# EAGLE board keyboard_translator_V1 v6 (EAGLE 9.7.0)
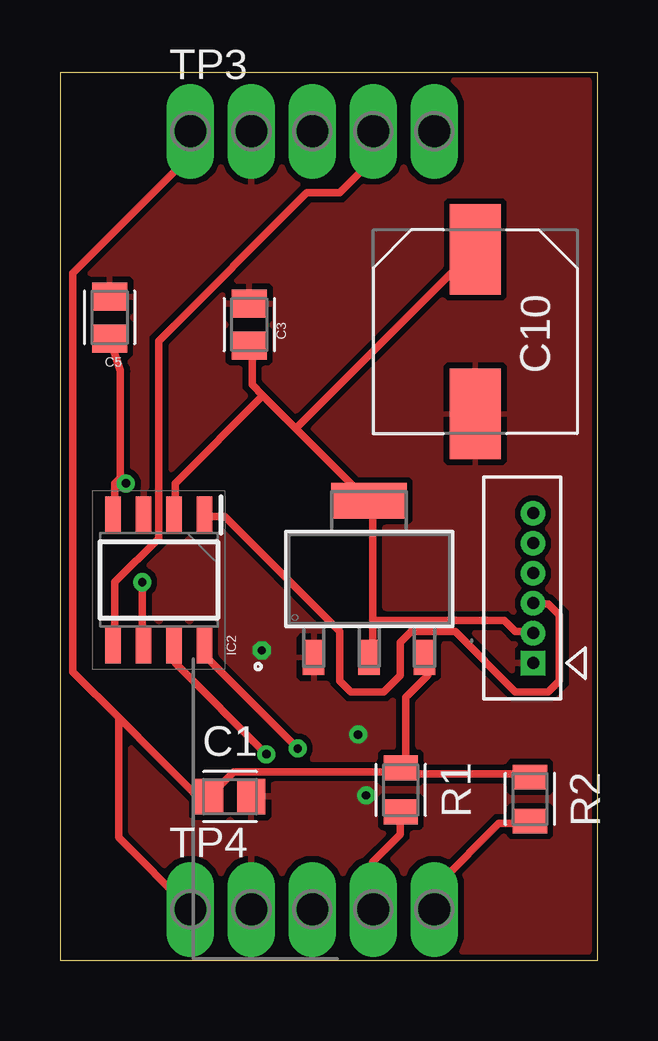
[diagram p0: board, top side]
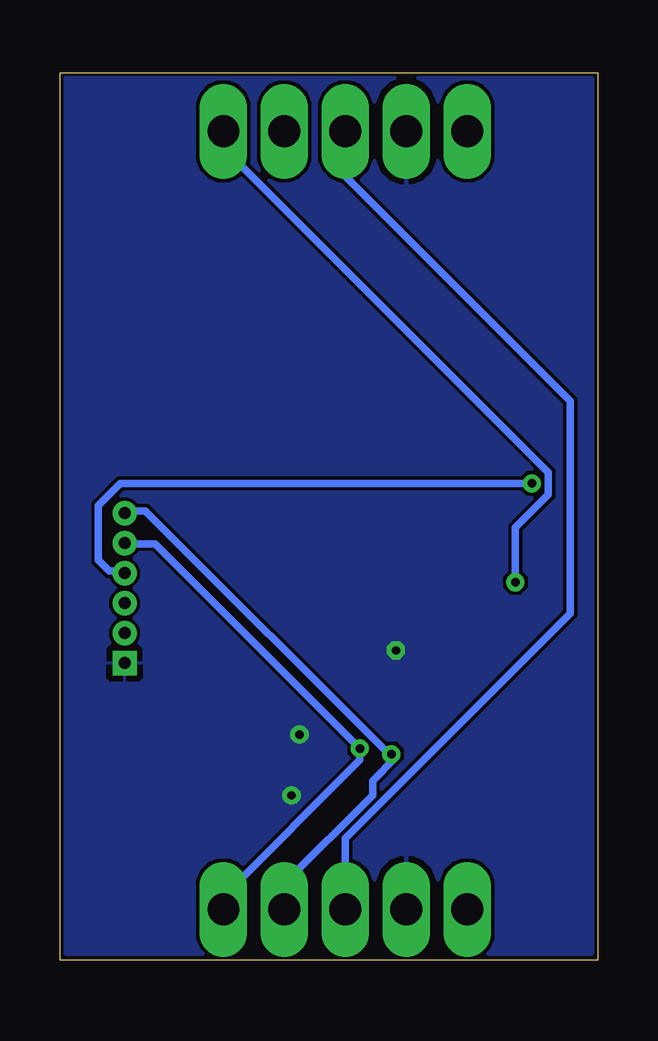
[diagram p1: board, bottom side, seen from below]

Size 22.4 x 37.01 mm. Coordinates in mm from the lower left corner, seen from the top.
Outline: 0,0 22.4,0 22.4,37.01 0,37.01 0,0
Copper layers (1*16): Top / Bottom
Stack-up Default Layer Stack: Top User Defined 0.035mm / Dielectric-1 User Defined 1.5mm / Bottom User Defined 0.035mm
Design rules: minimum copper width 12mil, minimum drill size 0.35mm, copper clearance wire_polygon to wire_polygon 6mil, copper clearance wire_polygon to pad_smd 6mil, copper clearance wire_polygon to via 6mil, copper clearance pad_smd to pad_smd 6mil, copper clearance pad_smd to via 6mil, copper clearance via to via 6mil, copper clearance smd to pad (same net) 6mil, copper clearance smd to via (same net) 6mil, copper clearance smd to smd (same net) 6mil, dimension clearance 6mil, restrict clearance 0mil, via restrict clearance 0mil, drill distance 6mil, keepout clearance 0mil

## Footprints (pad centres in the part's own frame; a part is rotated, then mirrored left to right if it is on the bottom)
CAPC2012X110 = smd 1.165 x 1.465: 1 -0.875,0; 2 0.875,0
CAPAE830X1050N = smd 3.764 x 2.115: 1 -3.426,0; 2 3.426,0
SOIC127P600X175-8N = smd 1.525 x 0.65: 1 -2.712,1.905; 2 -2.712,0.635; 3 -2.712,-0.635; 4 -2.712,-1.905; 5 2.712,-1.905; 6 2.712,-0.635; 7 2.712,0.635; 8 2.712,1.905
CON_530470610_MOL = drill 0.5 pad 0.85 square: 1 0,0 | drill 0.5 pad 0.85: 2 -1.25,0; 3 -2.5,0; 4 -3.75,0; 5 -5,0; 6 -6.25,0
RESC2012X65 = smd 1.031 x 1.42: 1 -0.919,0; 2 0.919,0
P5-25-13 = drill 1.321 pad 1.905 long: TP-1 -5.08,0; TP-2 -2.54,0; TP-3 0,0; TP-4 2.54,0; TP-5 5.08,0
SOT223-3_MXL = smd 0.889 x 1.473: 1 -2.311,-3.264; 2 0,-3.264; 3 2.311,-3.264 | smd 3.15 x 1.473: 4 0,3.264

## Placement (x,y rotation side)
C1  100nF  [CAPC2012X110]  7.09,6.83 0 top
C3  100nF  [CAPC2012X110]  7.88,26.51 90 top
C5  1uF  [CAPC2012X110]  2.07,26.81 90 top
C10  [CAPAE830X1050N]  17.3,26.21 270 top
IC2  STM32C011J6M6  [SOIC127P600X175-8N]  4.12,15.87 270 top
J1  530470610CON_530470610_MOL  [CON_530470610_MOL]  19.71,12.4 270 top
R1  NM 20k  [RESC2012X65]  14.2,7.11 270 top
R2  NM 20k  [RESC2012X65]  19.58,6.73 270 top
TP3  TP5P5-25-13  [P5-25-13]  10.52,34.57 0 top
TP4  TP5P5-25-13  [P5-25-13]  10.52,2.13 0 top
U1  SPX1117M3-L-3-3/TRSOT223-3_MXL  [SOT223-3_MXL]  12.88,15.9 0 top

## Library data of the parts
C1 C3 C5 C10 = Capacitor; CATEGORY: Capacitor
IC2 = STM32C011J6M6; DESCRIPTION: Mainstream Arm Cortex-M0+ MCU with 32 Kbytes of Flash memory, 6 Kbytes RAM, 48 MHz CPU, 2x USART, timers, ADC, comm. I/F, 2-3.6V; HEIGHT: 1.75mm; MANUFACTURER_NAME: STMicroelectronics; MANUFACTURER_PART_NUMBER: STM32C011J6M6; MOUSER_PART_NUMBER: 511-STM32C011J6M6; MOUSER_PRICE-STOCK: https://www.mouser.co.uk/ProductDetail/STMicroelectronics/STM32C011J6M6?qs=IPgv5n7u5Qas2LaNYHG%2FbQ%3D%3D
J1 = Library; COPYRIGHT: Copyright (C) 2024 Ultra Librarian. All rights reserved.; MANUFACTURER_PART_NUMBER: 530470610; MFR_NAME: Molex Connector Corporation
R1 R2 = Resistor; CATEGORY: Resistor; SUB-CATEGORY: Fixed
TP3 TP4 = testpad
U1 = 2023-10-17_10-46-12_Library; COPYRIGHT: Copyright (C) 2023 Ultra Librarian. All rights reserved.; MANUFACTURER_PART_NUMBER: SPX1117M3-L-3-3/TR; MFR_NAME: MaxLinear / Exar

## Nets
5V: C1.1 R1.1 R2.1 TP3.TP-1 TP4.TP-1 U1.3
AT_CLOCK_IN: IC2.6 TP3.TP-5
AT_DATA_IN: IC2.5 TP3.TP-4
GND: C1.2 C3.2 C5.2 C10.2 IC2.3 J1.1 TP3.TP-2 TP4.TP-2 U1.1
RST-TXD: C5.1 IC2.4 J1.4
SHIELD: TP3.TP-3 TP4.TP-3
TXD: IC2.1 J1.3
VDD: C3.1 C10.1 IC2.2 J1.2 U1.2 U1.4
XT_CLOCK_OUT: IC2.8 J1.5 R2.2 TP4.TP-5
XT_DATA_OUT: IC2.7 J1.6 R1.2 TP4.TP-4

## Tracks (layer width: path | path; a pad name or v marks a point on that pad's centre or on a via)
5V
  Top 0.305: R1.1 14.4,8.23 14.4,10.97 15.32,11.89 15.32,12.57 U1.3 | R2.1 19.43,7.77 14.63,7.77 14.4,8 R1.1 | 6.17,6.4 6.17,6.63 C1.1 | 2.5,10.07 2.44,10.01 2.44,5.13 TP4.TP-1 | 6.17,6.4 5.77,6.81 4.08,8.5 2.5,10.07 | 2.5,10.07 0.53,12.04 0.53,28.65 5.26,33.38 5.26,34.52 TP3.TP-1 | 6.17,6.4 C1.1 | R1.1 14.04,7.87 7.25,7.87 C1.1
AT_CLOCK_IN  (via drill 0.35)
  Top 0.305: v3.43,15.77 3.43,13.26 IC2.6
  Bottom 0.305: v3.43,15.77 3.43,18.06 2.06,19.43 2.06,20.34 15.54,33.83 15.54,34.52 TP3.TP-5
AT_DATA_IN
  Top 0.305: IC2.5 2.29,13.26 2.29,15.77 4.12,17.6 4.12,25.83 10.29,32 11.66,32 13.03,33.38 13.03,34.52 TP3.TP-4
GND  (via drill 0.35)
  other vias: 8.41,12.93 12.42,9.42 12.76,6.89
  pour Bottom: 0.15,36.93 22.25,36.93 22.25,0.2 0.15,0.2 0.15,0.1
  pour Top (isolate 0.254): 0.15,36.8 22.28,36.8 22.28,0.15 0.13,0.15 0.13,0.2
RST-TXD  (via drill 0.35)
  Top 0.305: 2.52,20.12 2.52,24.58 C5.1 | 2.52,20.12 2.29,19.89 2.29,18.75 IC2.4 | 2.52,20.12 v2.74,19.89
  Bottom 0.305: v2.74,19.89 19.89,19.89 20.8,18.97 20.8,16.69 20.34,16.23 19.89,16.23 J1.4
SHIELD
  Bottom 0.305: TP3.TP-3 10.52,34.52 10.52,32.69 1.14,23.32 1.14,14.47 10.52,5.1 TP4.TP-3
TXD
  Top 0.305: IC2.1 6.17,18.52 6.86,18.52 11.66,13.72 11.66,11.66 12.12,11.2 13.49,11.2 14.17,11.89 14.17,13.26 14.63,13.72 16.46,13.72 18.97,11.2 20.34,11.2 20.8,11.66 20.8,14.4 20.34,14.86 19.89,14.86 J1.3
VDD
  Top 0.305: 9.83,22.17 12.8,19.2 U1.4 13.03,18.97 13.03,14.17 | 9.83,22.17 8.46,23.55 | 8.46,23.55 8,24 8,25.6 C3.1 | 13.03,14.17 13.03,12.8 U1.2 | 8.46,23.55 4.8,19.89 4.8,18.75 IC2.2 | 13.03,14.17 18.52,14.17 18.97,13.72 19.66,13.72 J1.2 | 9.83,22.17 17.14,29.49 C10.1
XT_CLOCK_OUT  (via drill 0.35)
  Top 0.305: R2.2 19.43,5.71 18.29,5.71 15.77,3.2 15.77,2.29 TP4.TP-5 | v9.91,8.84 6.03,12.72 IC2.8
  Bottom 0.305: TP4.TP-5 15.54,2.29 15.54,2.73 9.91,8.37 v9.91,8.84 18.44,17.37 19.66,17.37 J1.5
XT_DATA_OUT  (via drill 0.35)
  Top 0.305: R1.2 14.17,6.17 14.17,5.26 13.03,4.12 13.03,2.29 TP4.TP-4 | IC2.7 4.8,13.03 4.8,12.4 v8.6,8.6
  Bottom 0.305: TP4.TP-4 13.03,2.29 13.03,3.23 9.38,6.88 9.38,7.5 8.44,8.44 | J1.6 19.66,18.75 18.85,18.75 8.54,8.44 8.44,8.44 | v8.6,8.6 8.44,8.44